# Altium PCB TEST.PcbDoc
Units mm, origin at the board's own origin, x right, y up, seen from the top; angles counter-clockwise.
Board outline 129 x 95 mm, 2 copper layers (Top Layer, Bottom Layer); 3 components, 0 nets, 6 pads, 0 vias.
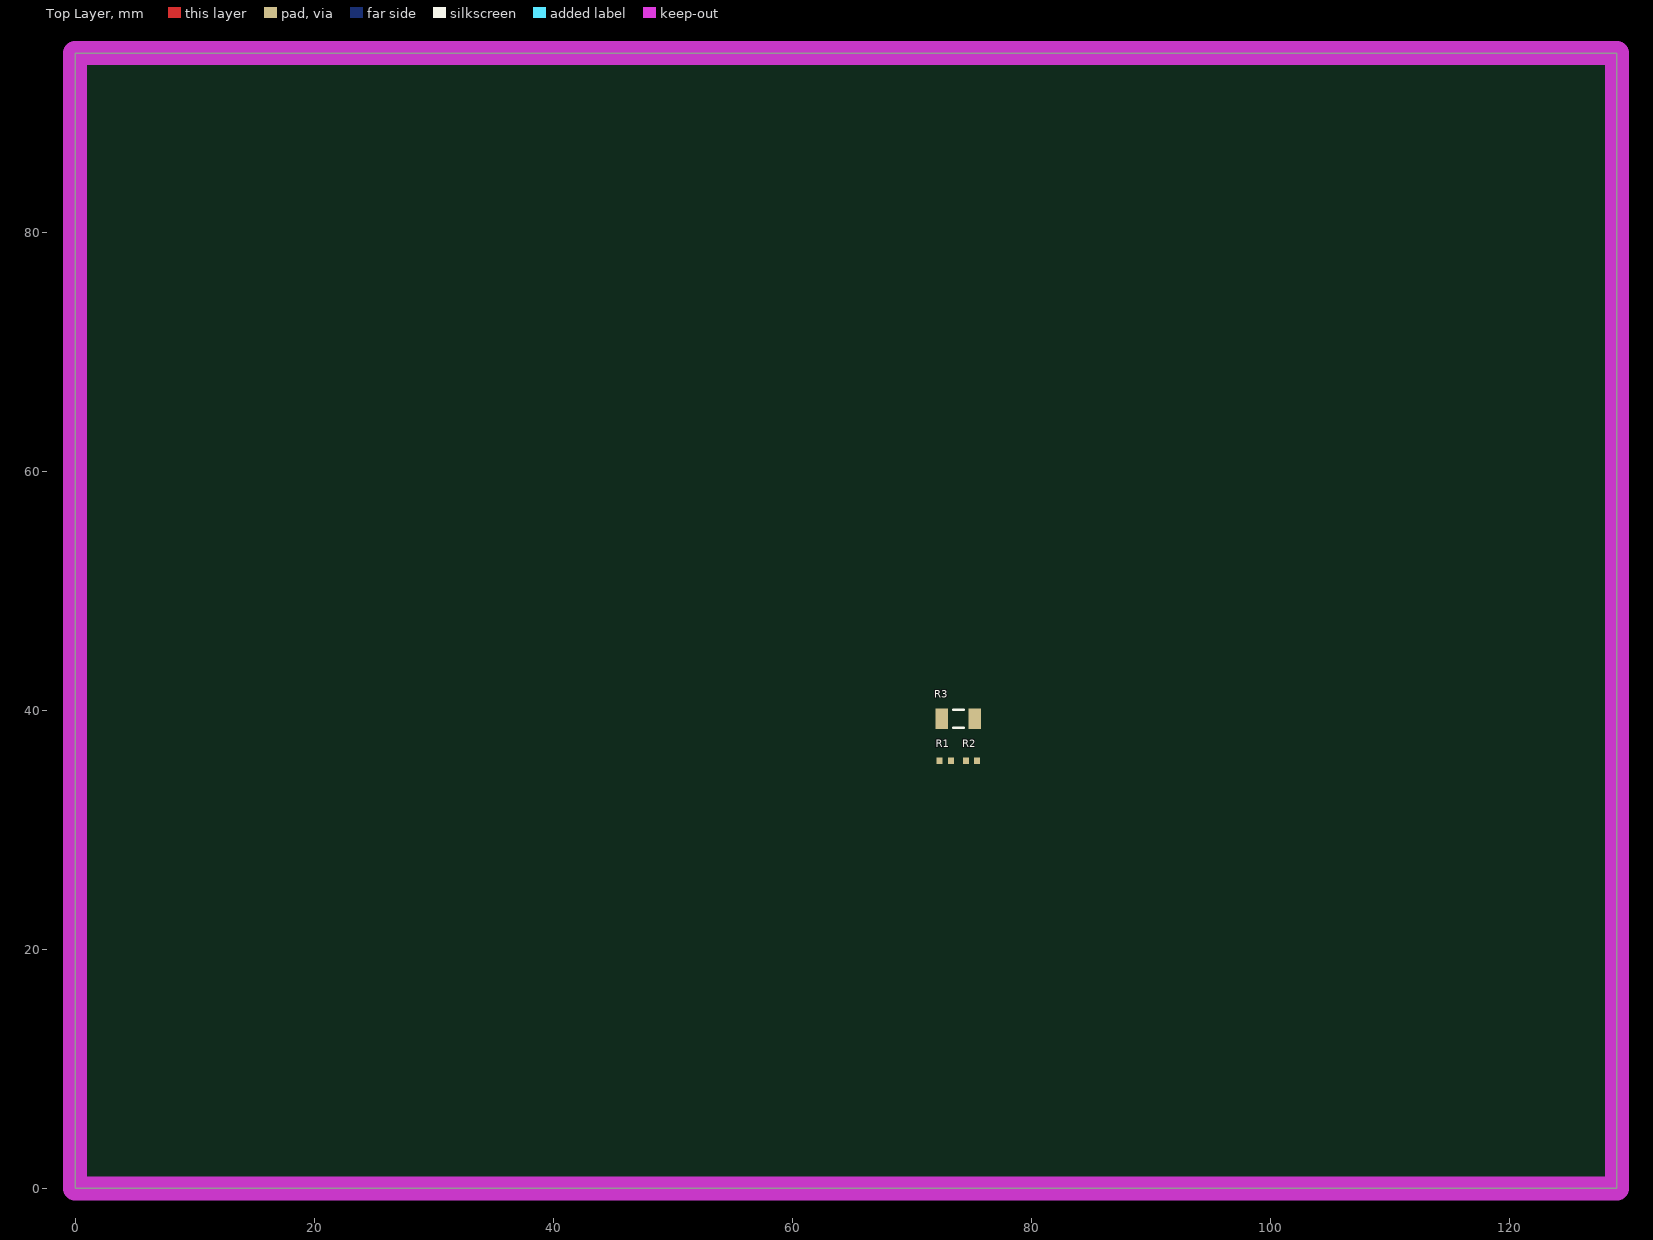
[diagram p0: Top Layer view]
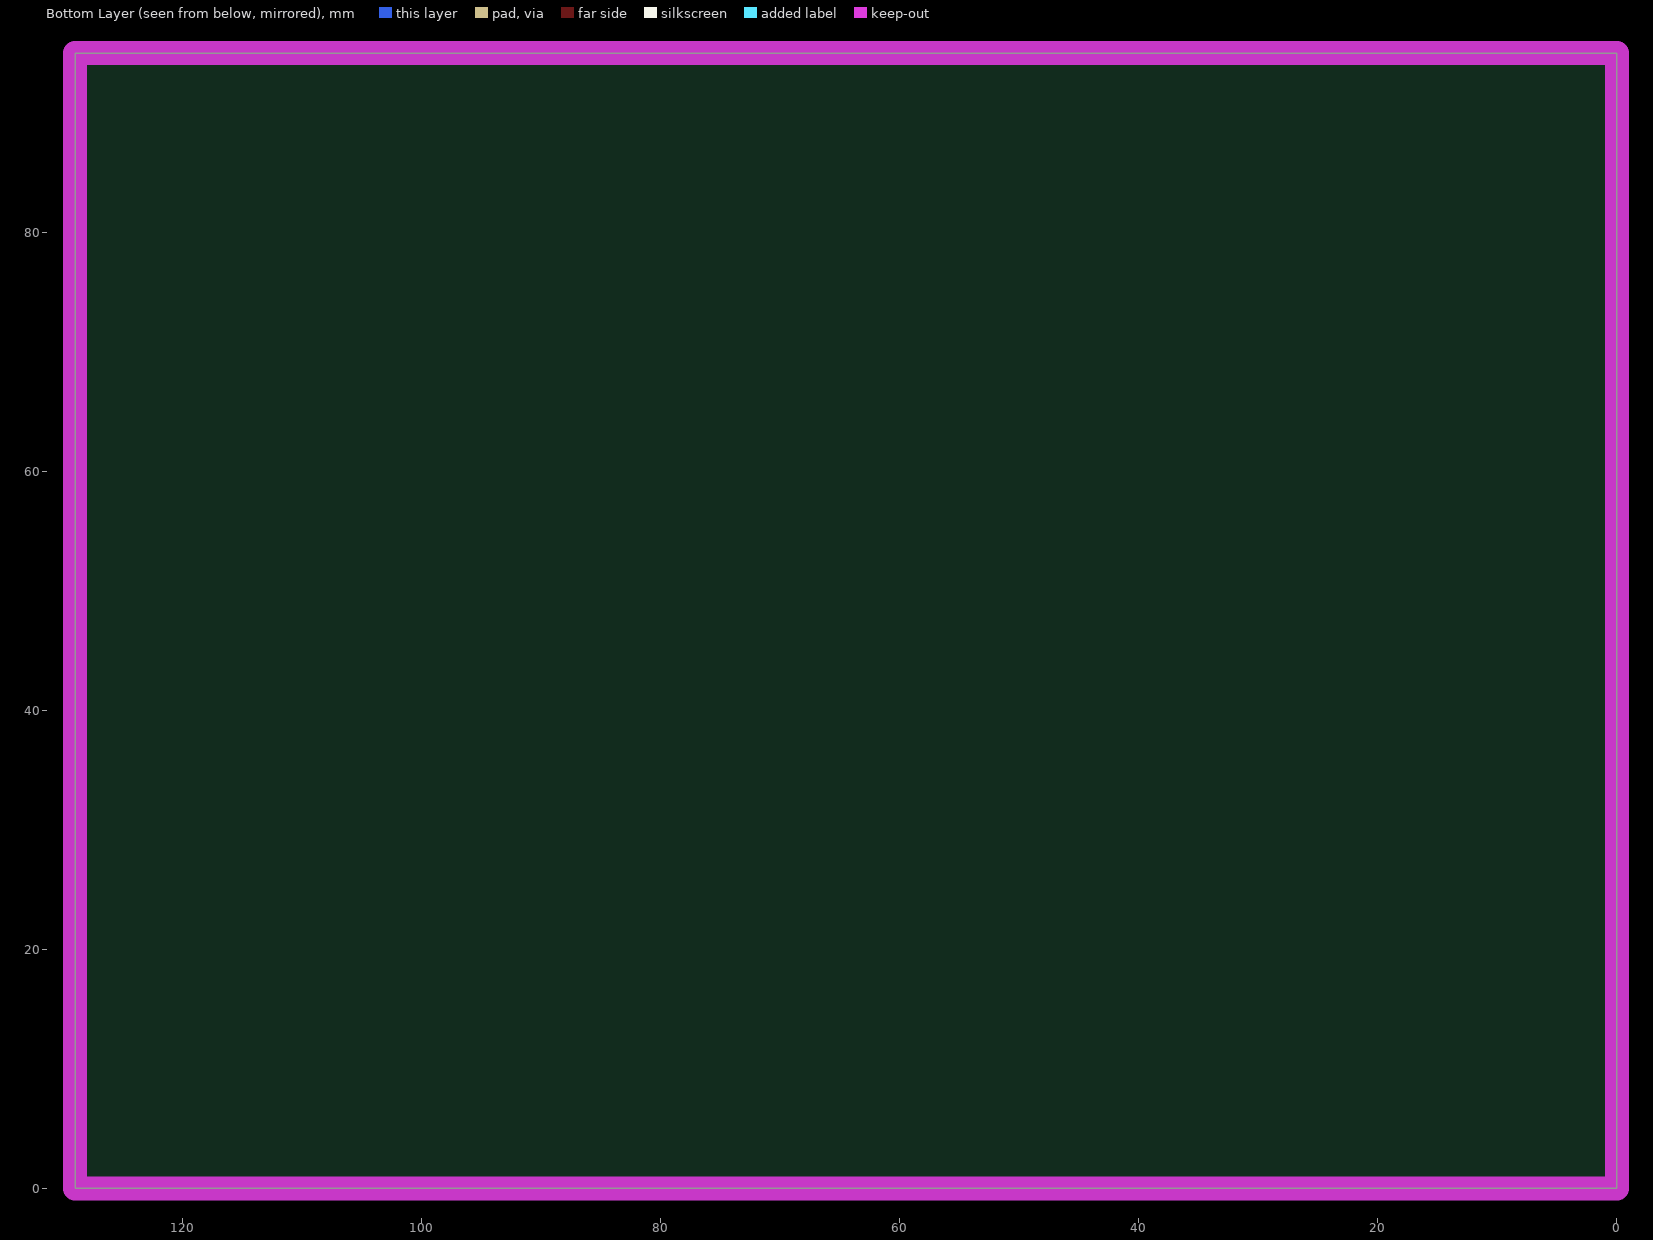
[diagram p1: Bottom Layer view, seen from below]

## Layer stack, top to bottom
Top Solder: solder mask 0.0102, Solder Resist, Dk 3.5
Top Layer: signal copper 0.0356
Dielectric 1: dielectric 0.32, FR-4, Dk 4.8
Bottom Layer: signal copper 0.0356
Bottom Solder: solder mask 0.0102, Solder Resist, Dk 3.5

## Board outline
0,0 129,0 129,95 0,95

## Design rules (kind name [scope] priority, off if disabled: settings)
Clearance [All] p1: gap=0.254 ignorepadtopadclearanceinfootprint=FALSE except(0: Arc-Hole Track-Hole SMDPad-Hole THPad-Hole Via-Hole Fill-Hole Poly-Hole Region-Hole Text-Hole)
PolygonConnect [All] p1: connectstyle=Relief reliefconductorwidth=0.254 reliefentries=4 polygonreliefangle="90 Angle" airgapwidth=0.254
RoutingVias [All] p1: holewidth=0.711 width=1.27 viastyle="Through Hole" minholewidth=0.711 minwidth=1.27 maxholewidth=0.711 maxwidth=1.27
SolderMaskExpansion [All] p1: expansion=0.102 istentingtop=FALSE
Width [All] p1: maxlimit=0.254 minlimit=0.254 preferedwidth=0.254
30 further rules are at their usual default settings.

## Components (designator, comment, footprint, x,y, rotation, side; value= is the part's Value field where it differs from the comment)
R1 "1kΩ 1%" RESC1005X04N 72.8,35.8 r0 top
R2 "1kΩ 1%" RESC1005X04N 75,35.8 r0 top
R3 "3.9MΩ 1%" RESC3016X06N 73.9,39.3 r180 top

## Footprints (in the part's own frame and the unit in brackets; to place one, negate y for a bottom-side part, rotate by r counter-clockwise, add the part's x,y. Pads: shape width x height; smd on the part's side, far side on the other; paste and mask are expansions set on the pad)
RESC1005X04N [mm] "Chip Resistor, 2-Leads, Body 1,00x0,50mm, IPC Medium Density"
  rect 0.5x0.55 smd: 1(-0.475,0) 2(0.475,0)
  body extent -0.53,-0.28 0.53,0.28, height 0.4
RESC3016X06N [mm] "Chip Resistor, 2-Leads, Body 3,05x1,60mm, IPC Medium Density"
  rect 1.05x1.7 smd: 1(-1.375,0) 2(1.375,0)
  silkscreen extent -0.45,-0.75 0.45,0.75, body extent -1.55,-0.85 1.55,0.85, height 0.65

## Part data
R1 R2: library part RES0000018, "Film Resistor, 0402, 1kΩ, 1%,  1/16W", Case Code (for SMD)=0402, Manufacturer=YAGEO, Manufacturer Part Number=RC0402FR-071KL, Maximum Operating Temperature="155 degC", Power=1/16W, Power Rating (WC)="0.0625 W", Voltage Rating="50 V", Datasheet (Manufacturer LINK)=https://www.yageo.com/upload/media/product/productsearch/datasheet/rchip/PYu-RC_Group_51_RoHS_L_11.pdf, Datasheet (Windchill LINK)=https://windchill.embraco.com/Windchill/app/#ptc1/tcomp/infoPage?ContainerOid=OR%3Awt.inf.library.WTLibrary%3A400340347&oid=VR%3Awt.doc.WTDocument%3A1004142051&u8=1, Height (mm)=0.35, Length (mm)=1, Mounting technology=SMT, Name="Film Resistor, 0402 SIZE, 1kR, 1%, 1/16", Number=193500369, UNIQUEID=RES0000018, Width (mm)=0.5
R3: library part RES0000021, "Film Resistor, 1206, 3.9MΩ, 1%, 1/4W", Case Code (for SMD)=1206, Manufacturer=Yageo, Manufacturer Part Number=RC1206FR-073M9L, Maximum Operating Temperature="155 degC", Power=1/16W, Power Rating (WC)="0.0625 W", Voltage Rating="200 V", Datasheet (Windchill LINK)=https://windchill.embraco.com/Windchill/app/#ptc1/tcomp/infoPage?ContainerOid=OR%3Awt.inf.library.WTLibrary%3A400340347&oid=VR%3Awt.doc.WTDocument%3A524289079&u8=1, Height (mm)=0.55, Length (mm)=3.1, Mounting technology=SMT, Name="Film Resistor 1206 3M9 1% 1/4W", Number=193500507, UNIQUEID=RES0000021, Width (mm)=1.6

## Nets (pads, with @x,y where several pads share a name; then routed paths per layer and width w, separated by ;. In a path a pad name is that pad's centre, name@x,y a point inside that pad or via, vN(x,y) a via of type N, cw(c..) or ccw(c..) an arc to the next point about the centre after c; other vN are vias at no path point)
pads on no net: R1.1 R1.2 R2.1 R2.2 R3.1 R3.2

## Keep-outs
Keep-Out Layer:
  the board outline again, w2